# Altium PCB Railgun Control Board PCB Mk2.0.PcbDoc (part 1 of 2)
Units mm, origin at the board's own origin, x right, y up, seen from the top; angles counter-clockwise.
Board outline 60 x 60 mm, 4 copper layers (Top Layer, Layer 1, Layer 2, Bottom Layer), stack 1.312 mm thick; 103 components, 59 nets, 337 pads, 9 vias.
Unrouted connection lines stored in the file: 214.
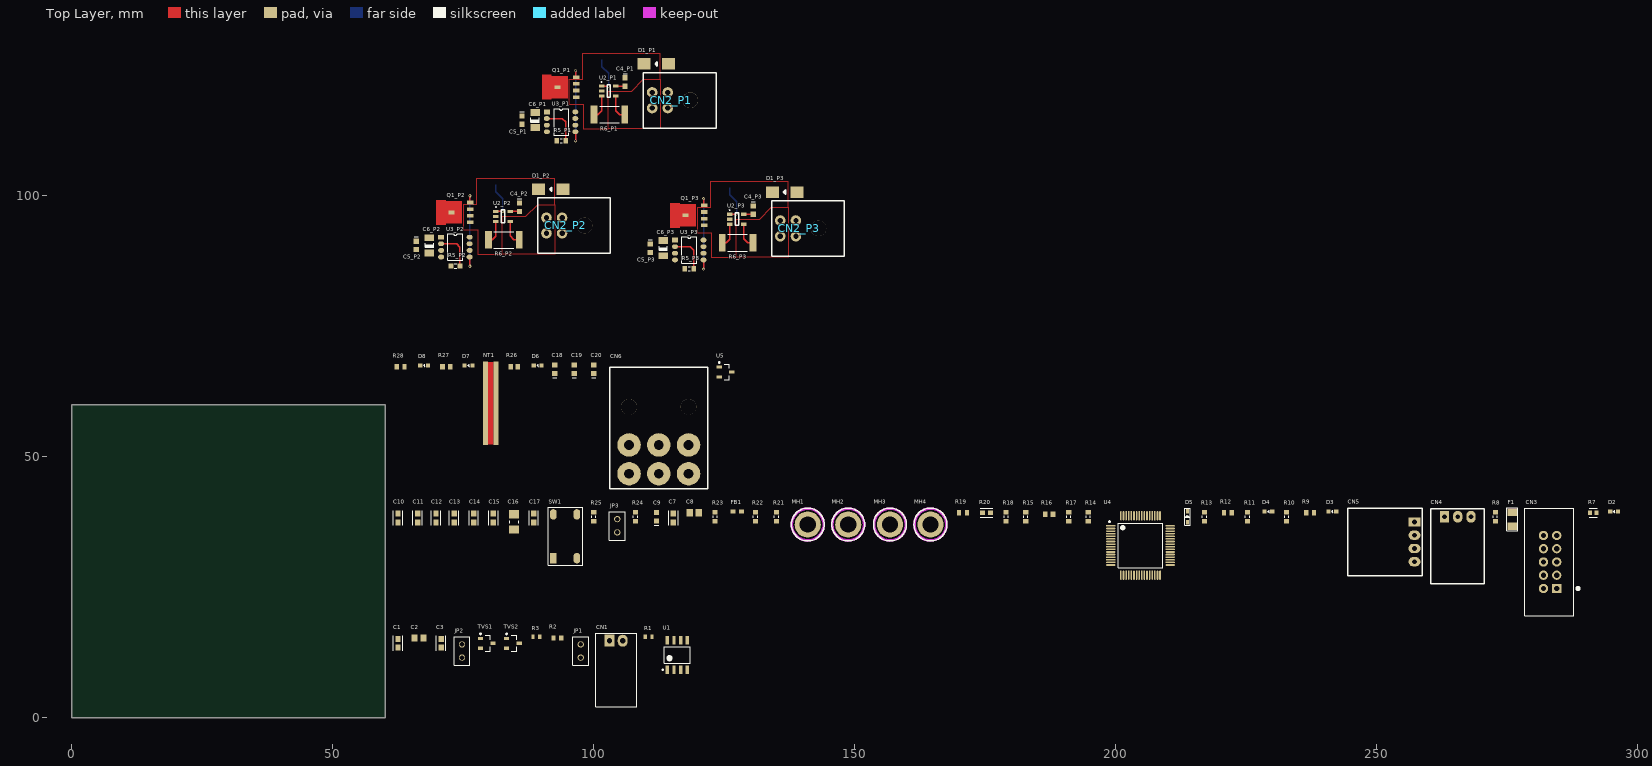
[diagram p0: Top Layer view]
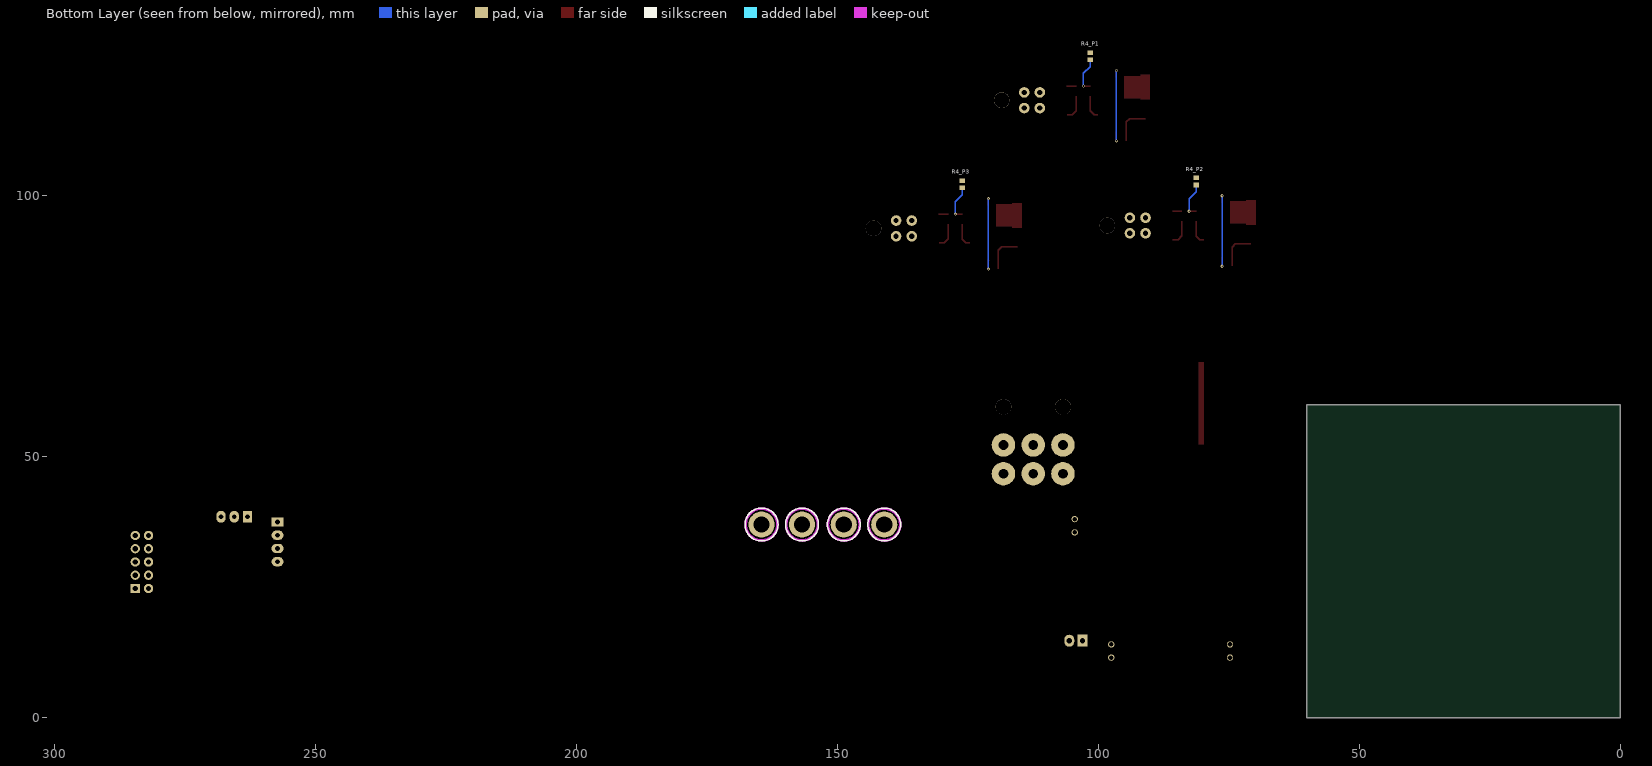
[diagram p1: Bottom Layer view, seen from below]

## Layer stack, top to bottom
Top Solder: solder mask 0.0102, Solder Resist, Dk 3.5
Top Layer: signal copper 0.035
Dielectric 2: prepreg 0.0711, PP-006, Dk 4.6
Layer 1: signal copper 0.0175
Dielectric 1: core 1.065, FR-4, Dk 4.8
Layer 2: signal copper 0.0175
Dielectric 3: prepreg 0.0711, PP-006, Dk 4.6
Bottom Layer: signal copper 0.035
Bottom Solder: solder mask 0.0102, Solder Resist, Dk 3.5

## Board outline
0,0 0,60 60,60 60,0

## Design rules (kind name [scope] priority, off if disabled: settings)
Clearance [All] p1: gap=0.254 ignorepadtopadclearanceinfootprint=TRUE except(0: Arc-Hole Track-Hole Via-Hole Fill-Hole Poly-Hole Region-Hole Text-Hole; 0.09: Arc-Arc Arc-Track Track-Track; 0.127: SMDPad-SMDPad; 0.2: Arc-SMDPad Track-SMDPad; 0.54: SMDPad-Hole THPad-Hole)
DiffPairsRouting [All] p1: maxlimit=0.254 minlimit=0.254 mostfreqgap=0.254 toplayer_minwidth=0.254 toplayer_maxwidth=0.381 toplayer_prefwidth=0.381 midlayer1_minwidth=0.254 midlayer1_maxwidth=0.381 midlayer1_prefwidth=0.381 midlayer2_minwidth=0.254 midlayer2_maxwidth=0.381 midlayer2_prefwidth=0.381 bottomlayer_minwidth=0.254 bottomlayer_maxwidth=0.381 bottomlayer_prefwidth=0.381 maxuncoupledlength=12.7
HoleToHoleClearance [All] p1: gap=0.54 allowstackedmicrovias=TRUE
PolygonConnect [All] p1: connectstyle=Relief reliefconductorwidth=0.254 reliefentries=4 polygonreliefangle="90 Angle" airgapwidth=0.254
RoomDefinition P1 [InComponentClass('P1')] p1: confinementstyle=ConfineIn formatcopy=TRUE lockcomponents=FALSE outline 82.5,107.5 123.75,107.5 123.75,129.5 82.5,129.5
RoomDefinition Power [InComponentClass('Power')] p2: confinementstyle=ConfineIn formatcopy=TRUE lockcomponents=FALSE outline 61,43.5 127.5,43.5 127.5,70.25 61,70.25
RoomDefinition P3 [InComponentClass('P3')] p3: confinementstyle=ConfineIn formatcopy=TRUE lockcomponents=FALSE outline 107.05,82.95 148.3,82.95 148.3,104.95 107.05,104.95
RoomDefinition P2 [InComponentClass('P2')] p4: confinementstyle=ConfineIn formatcopy=TRUE lockcomponents=FALSE outline 62.25,83.5 103.5,83.5 103.5,105.5 62.25,105.5
RoomDefinition Micro [InComponentClass('Micro')] p5: confinementstyle=ConfineIn formatcopy=TRUE lockcomponents=FALSE outline 61.25,19.25 296.999,19.25 296.999,42.25 61.25,42.25
RoomDefinition CAN [InComponentClass('CAN')] p6: confinementstyle=ConfineIn formatcopy=TRUE lockcomponents=FALSE outline 61.25,1.75 119.25,1.75 119.25,18.25 61.25,18.25
RoutingVias [All] p1: holewidth=0.3 width=0.6 viastyle="Through Hole" minholewidth=0.2 minwidth=0.45 maxholewidth=2 maxwidth=2
SolderMaskExpansion [All] p1: expansion=0.1 istentingtop=FALSE
UnRoutedNet [All] p1: checkbadconnections=TRUE
Width [All] p1: maxlimit=0.254 minlimit=0.09 preferedwidth=0.203 toplayer_prefwidth=0.203 midlayer2_prefwidth=0.203 bottomlayer_prefwidth=0.203 minimp=50.000000 maximp=50.000000 favimp=50.000000
27 further rules are at their usual default settings.

## Classes and differential pairs
channel class "Control Gates": P1 P2 P3
net class Phase_Input[1..3]: Phase_Input1 Phase_Input2 Phase_Input3
net class Phase_Current[1..3]: Phase_Current1 Phase_Current2 Phase_Current3
component class Power: C18 C19 C20 CN6 D6 D7 D8 NT1 R26 R27 R28 U5
component class P3: C4_P3 C5_P3 C6_P3 CN2_P3 D1_P3 Q1_P3 R4_P3 R5_P3 R6_P3 U2_P3 U3_P3
component class P2: C4_P2 C5_P2 C6_P2 CN2_P2 D1_P2 Q1_P2 R4_P2 R5_P2 R6_P2 U2_P2 U3_P2
component class P1: C4_P1 C5_P1 C6_P1 CN2_P1 D1_P1 Q1_P1 R4_P1 R5_P1 R6_P1 U2_P1 U3_P1
component class Micro: C7 C8 C9 C10 C11 C12 C13 C14 C15 C16 C17 CN3 CN4 CN5 D2 D3 D4 D5 F1 FB1 JP3 MH1 MH2 MH3 MH4 R7 R8 R9 R10 R11 R12 R13 R14 R15 R16 R17 R18 R19 R20 R21 R22 R23 R24 R25 SW1 U4
component class CAN: C1 C2 C3 CN1 JP1 JP2 R1 R2 R3 TVS1 TVS2 U1
differential pair CAN: +CAN_P -CAN_N

## Components (designator, comment, footprint, x,y, rotation, side; value= is the part's Value field where it differs from the comment)
C1 "CL10B104JB8NNNC" FP-CL10-0_1-IPC_A 62.5,14.25 r90 top
C2 "CL21B105KBFNNNG" "0803 CAP" 66.5,15.25 r0 top
C3 "CL10B104JB8NNNC" FP-CL10-0_1-IPC_A 70.75,14.25 r90 top
C4_P1 "0.1uF, 50V, 10%, X7R, 1608" "CAPC1608N(0603\")" 106,121.8 r270 top (schematic designator C4)
C4_P2 "0.1uF, 50V, 10%, X7R, 1608" "CAPC1608N(0603\")" 85.75,97.8 r270 top (schematic designator C4)
C4_P3 "0.1uF, 50V, 10%, X7R, 1608" "CAPC1608N(0603\")" 130.55,97.25 r270 top (schematic designator C4)
C5_P1 "0.1uF, 50V, 10%, X7R, 1608" "CAPC1608N(0603\")" 86.25,114.5 r270 top (schematic designator C5)
C5_P2 "0.1uF, 50V, 10%, X7R, 1608" "CAPC1608N(0603\")" 66,90.5 r270 top (schematic designator C5)
C5_P3 "0.1uF, 50V, 10%, X7R, 1608" "CAPC1608N(0603\")" 110.8,89.95 r270 top (schematic designator C5)
C6_P1 "10uF 50V 1206 SMD, Ceramic" "CAPC3216N(1206\")" 88.75,114.5 r270 top value=10µF (schematic designator C6)
C6_P2 "10uF 50V 1206 SMD, Ceramic" "CAPC3216N(1206\")" 68.5,90.5 r270 top value=10µF (schematic designator C6)
C6_P3 "10uF 50V 1206 SMD, Ceramic" "CAPC3216N(1206\")" 113.3,89.95 r270 top value=10µF (schematic designator C6)
C7 "CL10B104JB8NNNC" FP-CL10-0_1-IPC_A 115.25,38.25 r90 top
C8 "CL21B105KBFNNNG" "0803 CAP" 119.25,39.25 r0 top
C9 "2.2uF, 50V, 0603 SMD, X5R, Ceramic" "CAPC1608N(0603\")" 112,38.5 r90 top value=2.2µF
C10 "CL10B104JB8NNNC" FP-CL10-0_1-IPC_A 62.5,38.25 r90 top
C11 "CL10B104JB8NNNC" FP-CL10-0_1-IPC_A 66.25,38.25 r90 top
C12 "CL10B104JB8NNNC" FP-CL10-0_1-IPC_A 69.75,38.25 r90 top
C13 "CL10B104JB8NNNC" FP-CL10-0_1-IPC_A 73.25,38.25 r90 top
C14 "CL10B104JB8NNNC" FP-CL10-0_1-IPC_A 77,38.25 r90 top
C15 "CL10B104JB8NNNC" FP-CL10-0_1-IPC_A 80.75,38.25 r90 top
C16 "CL31B106KBHNNNE" CAPC3216X180X50ML20T30 84.75,37.5 r90 top
C17 "CL10B104JB8NNNC" FP-CL10-0_1-IPC_A 88.5,38.25 r90 top
C18 "0.1uF, 50V, 10%, X7R, 1608" "CAPC1608N(0603\")" 92.5,66.75 r90 top
C19 "1uF 50V 0603 SMD, Ceramic" "CAPC1608N(0603\")" 96.25,66.75 r90 top value=1µF
C20 "1uF 50V 0603 SMD, Ceramic" "CAPC1608N(0603\")" 100,66.75 r90 top value=1µF
CN1 "1x2 Shrouded Right Angle" "2X1 Female Header" 103,14.75 r90 top
CN2_P1 "Header, Female, 2x2, RIght Angle, Pitch: 0.118\"  (3.00mm), THT" "2x2 Pitch 118mil connector" 114.18,119.8 r270 top (schematic designator CN2)
CN2_P2 "Header, Female, 2x2, RIght Angle, Pitch: 0.118\"  (3.00mm), THT" "2x2 Pitch 118mil connector" 93.93,95.8 r270 top (schematic designator CN2)
CN2_P3 "Header, Female, 2x2, RIght Angle, Pitch: 0.118\"  (3.00mm), THT" "2x2 Pitch 118mil connector" 138.73,95.25 r270 top (schematic designator CN2)
CN3 "ST Debug Header 10-pin THT" "10-pin shrouded header THT" 284.499,24.75 r90 top
CN4 "Header, Male, 1x3, RA, Pitch (2.54mm) 0.1\"" 5-103635-2-Footprint-1 262.999,38.5 r90 top
CN5 "Header, Male, 1x4, RA, Pitch 0.1\" (2.54mm)" "HEADER, MALE, SHROUDED, 4x1, PITCH 0.1\" (2.54mm), RA" 257.249,37.5 r0 top
CN6 "76825-0006" 76825-0006-Footprint-1 106.75,52.25 r0 top
D1_P1 "TSSA5U50E3GCT-ND" DO-214AC 112,125.25 r180 top (schematic designator D1)
D1_P2 "TSSA5U50E3GCT-ND" DO-214AC 91.75,101.25 r180 top (schematic designator D1)
D1_P3 "TSSA5U50E3GCT-ND" DO-214AC 136.55,100.7 r180 top (schematic designator D1)
D2 "LSQ976-NR-1" FP-LB_Q39E-MFG 295.499,39.5 r0 top
D3 "LBQ39E-N1OO-35-1" FP-LB_Q39E-MFG 241.5,39.5 r0 top
D4 "LT Q39G-Q1OO-25-1" FP-LB_Q39E-MFG 229.25,39.5 r0 top
D5 "CUS08F30,H3F" SC-76 213.75,38.5 r90 top
D6 "LT Q39G-Q1OO-25-1" FP-LB_Q39E-MFG 89.25,67.5 r0 top
D7 "LT Q39G-Q1OO-25-1" FP-LB_Q39E-MFG 76,67.5 r0 top
D8 "LT Q39G-Q1OO-25-1" FP-LB_Q39E-MFG 67.5,67.5 r0 top
F1 "SMD Fuse, 2A, 63V," "1206 SMD" 275.999,38 r90 top
FB1 "BLM18AG601SN1D" MURA-BLM18-F-H1-CHIP-2_V 127.5,39.5 r0 top
JP1 "1x2 Male Header" "2X1 Males Header" 97.5,11.5 r90 top
JP2 "1x2 Male Header" "2X1 Males Header" 74.75,11.5 r90 top
JP3 "1x2 Male Header" "2X1 Males Header" 104.5,35.5 r90 top
MH1 "Mount_Hole_3mm" Mount-Hole_3mm 141,37 r0 top
MH2 "Mount_Hole_3mm" Mount-Hole_3mm 148.75,37 r0 top
MH3 "Mount_Hole_3mm" Mount-Hole_3mm 156.75,37 r0 top
MH4 "Mount_Hole_3mm" Mount-Hole_3mm 164.5,37 r0 top
NT1 "Net Tie, 16x3mm" NETTIE_16x3mm 80.25,60.25 r0 top net-tie
Q1_P1 "MOSFET N-Channel, 40V, 100A, 272W" LFPAK-PowerSO8 96.6,118.895 r90 top (schematic designator Q1)
Q1_P2 "MOSFET N-Channel, 40V, 100A, 272W" LFPAK-PowerSO8 76.35,94.895 r90 top (schematic designator Q1)
Q1_P3 "MOSFET N-Channel, 40V, 100A, 272W" LFPAK-PowerSO8 121.15,94.345 r90 top (schematic designator Q1)
R1 "RC0603FR-0733RL" RESC1608X55X25LL10T15 110.5,15.5 r0 top
R2 "RC0603FR-07120RL" RESC1608X55X25ML10T15 93,15.25 r0 top
R3 "RC0603FR-0733RL" RESC1608X55X25LL10T15 89,15.5 r0 top
R4_P1 "32.4kR, 1%, 0603, 1/10W" RESC1609X50X30ML10T20 101.5,126.75 r270 bottom (schematic designator R4)
R4_P2 "32.4kR, 1%, 0603, 1/10W" RESC1609X50X30ML10T20 81.25,102.75 r270 bottom (schematic designator R4)
R4_P3 "32.4kR, 1%, 0603, 1/10W" RESC1609X50X30ML10T20 126.05,102.2 r270 bottom (schematic designator R4)
R5_P1 "10kR, 1%, 1/10W, 0603 SMD" "RESC1608N(0603\")" 93.75,110.55 r180 top value=10k (schematic designator R5)
R5_P2 "10kR, 1%, 1/10W, 0603 SMD" "RESC1608N(0603\")" 73.5,86.55 r180 top value=10k (schematic designator R5)
R5_P3 "10kR, 1%, 1/10W, 0603 SMD" "RESC1608N(0603\")" 118.3,86 r180 top value=10k (schematic designator R5)
R6_P1 "0R02, 1%, 2W, 2512 SMD" "RESC6332N(2512\")" 103,115.55 r180 top value=0.02 (schematic designator R6)
R6_P2 "0R02, 1%, 2W, 2512 SMD" "RESC6332N(2512\")" 82.75,91.55 r180 top value=0.02 (schematic designator R6)
R6_P3 "0R02, 1%, 2W, 2512 SMD" "RESC6332N(2512\")" 127.55,91 r180 top value=0.02 (schematic designator R6)
R7 "CRCW0603330RFKEA" FP-CRCW0603-e3-IPC_C 291.499,39.25 r0 top
R8 "1kR, 1%, 1/10W , 0603, SMD" "RESC1608N(0603\")" 272.749,38.5 r90 top value=1k
R9 "RC0603FR-07110RL" RESC1608X55X25ML10T15 237.25,39.25 r0 top
R10 "10kR, 1%, 1/10W, 0603 SMD" "RESC1608N(0603\")" 232.75,38.5 r90 top value=10k
R11 "10kR, 1%, 1/10W, 0603 SMD" "RESC1608N(0603\")" 225.25,38.5 r90 top value=10k
R12 "RC0603FR-07110RL" RESC1608X55X25ML10T15 221.5,39.25 r0 top
R13 "10kR, 1%, 1/10W, 0603 SMD" "RESC1608N(0603\")" 217,38.5 r90 top value=10k
R14 "10kR, 1%, 1/10W, 0603 SMD" "RESC1608N(0603\")" 194.75,38.5 r90 top value=10k
R15 "10kR, 1%, 1/10W, 0603 SMD" "RESC1608N(0603\")" 182.75,38.5 r90 top value=10k
R16 "ERJ-3EKF8252V" RESC1608X55X30ML15T15 187.25,39 r0 top
R17 "16kR, 1%, 1/10W, 0603 SMD" "RESC1608N(0603\")" 191,38.5 r90 top value=16k
R18 "10kR, 1%, 1/10W, 0603 SMD" "RESC1608N(0603\")" 179,38.5 r90 top value=10k
R19 "RC0603FR-0710KL" RESC1608X55X25ML10T15 170.75,39.25 r0 top
R20 "27kR, 1%, 1/10W, 0603" FP-CRGCQ0603-IPC_B 175.25,39.25 r0 top
R21 "1kR, 1%, 1/10W , 0603, SMD" "RESC1608N(0603\")" 135,38.5 r90 top value=1k
R22 "1kR, 1%, 1/10W , 0603, SMD" "RESC1608N(0603\")" 131,38.5 r90 top value=1k
R23 "1kR, 1%, 1/10W , 0603, SMD" "RESC1608N(0603\")" 123.25,38.5 r90 top value=1k
R24 "10kR, 1%, 1/10W, 0603 SMD" "RESC1608N(0603\")" 108,38.5 r90 top value=10k
R25 "10kR, 1%, 1/10W, 0603 SMD" "RESC1608N(0603\")" 100,38.5 r90 top value=10k
R26 "CRCW06036K34FKEA" RESC1609X50X30ML10T20 84.75,67.25 r0 top
R27 "ERJ-3EKF5360V" RESC1608X55X30ML15T15 71.75,67.25 r0 top
R28 "RC0603FR-07110RL" RESC1608X55X25ML10T15 63,67.25 r0 top
SW1 "PTS645SL43SMTR92LFS" 4-SPST-NO 92.25,30.75 r90 top
TVS1 "PESD36VS2UT,215" SOT95P245X110-3N 79.5,14.25 r0 top
TVS2 "PESD36VS2UT,215" SOT95P245X110-3N 84.5,14.25 r0 top
U1 "CAN Transceiver" 8-SOIC 116,12 r90 top
U2_P1 "INA168, Current Sensor, High-Side, Analog" SOT23-5 102.85,120.05 r270 top (schematic designator U2)
U2_P2 "INA168, Current Sensor, High-Side, Analog" SOT23-5 82.6,96.05 r270 top (schematic designator U2)
U2_P3 "INA168, Current Sensor, High-Side, Analog" SOT23-5 127.4,95.5 r270 top (schematic designator U2)
U3_P1 "MIC5014YM-TR" "SOC 8" 91,116.07 r0 top (schematic designator U3)
U3_P2 "MIC5014YM-TR" "SOC 8" 70.75,92.07 r0 top (schematic designator U3)
U3_P3 "MIC5014YM-TR" "SOC 8" 115.55,91.52 r0 top (schematic designator U3)
U4 "STM32F413RGT6" FP-LQFP64-5W-IPC_A 204.75,33 r0 top
U5 "3.3V 250mA Linear Reg LDO" SOT95P245X110-3N 125.25,66.25 r0 top

## Footprints (in the part's own frame and the unit in brackets; to place one, negate y for a bottom-side part, rotate by r counter-clockwise, add the part's x,y. Pads: shape width x height; smd on the part's side, far side on the other; paste and mask are expansions set on the pad)
"2X1 Female Header" [mil]
  rect 90x75 hole 40: 1(0,0)
  oval 90x75 hole 40: 2(0,-100)
  silkscreen extent -500,-205 55,105, body extent -495,-200 40,100, height 273
"2X1 Males Header" [mm]
  round 1.2 hole 0.9: 1(0,0) 2(2.54,0)
  silkscreen extent -1.5,-1.5 4,1.5, body extent -1.27,-1.24 3.81,1.25, height 8.54
"2x2 Pitch 118mil connector" [mil]
  round 80 hole 40: 1(0,0) 2(117.99,0) 3(0,-118) 4(118,-118)
  round 118.11 hole 118.11: None(59.06,170.08)
  silkscreen extent -150,-184 270,365, body extent -141,-129 259,353, height 348
4-SPST-NO [mm]
  rect 2x1.3 smd: 1(-0.2,0)
  oval 2x1.3 smd: 2(8.2,0) 3(-0.2,-4.5) 4(8.2,-4.5)
  silkscreen extent -1.52,-5.59 9.53,1.02, body extent -0.56,-5.29 8.44,0.71, height 5
5-103635-2-Footprint-1 [mil]
  rect 90x70 hole 35: 1(0,0)
  oval 90x70 hole 35: 2(0,-100) 3(0,-200)
  silkscreen extent -505,-300 60,105, body extent -495,-295 40,100, height 280
8-SOIC [mm] "SOIC, 8-Leads, Body 5x4mm, Pitch 1.27mm, IPC Low Density"
  rrect15% 1.65x0.65 smd: 1(-2.825,1.905) 2(-2.825,0.635) 3(-2.825,-0.635) 4(-2.825,-1.905) 5(2.825,-1.905) 6(2.825,-0.635) 7(2.825,0.635) 8(2.825,1.905)
  silkscreen extent -2.95,-2.5 1.6,2.9, body extent -3,-2.45 3,2.45, height 1.63
"10-pin shrouded header THT" [mil]
  rect 70x70 hole 40: 1(0,0)
  round 70 hole 40: 2(100,0) 3(200,0) 4(300,0) 5(400,0) 6(0,100) 7(100,100) 8(200,100) 9(300,100) 10(400,100)
  silkscreen extent -205,-170 605,240, body extent -198,-124 598,234, height 358
"0803 CAP" [mm] "Chip Capacitor, 2-Leads, Body 2.00x1.25mm, IPC Medium Density"
  rect 1.2x1.4 smd: 1(-0.85,0) 2(0.85,0)
  body extent -1.05,-0.67 1.05,0.67, height 1.25
"1206 SMD" [mm]
  rect 1.42x1.78 smd: 1(-1.33,0) 2(1.33,0)
  silkscreen extent -2.22,-1.07 2.21,1.07, body extent -1.6,-0.8 1.6,0.8, height 0.6
76825-0006-Footprint-1 [mm]
  round 4.5 hole 1.85: 1(0,0) 2(5.7,0) 3(11.4,0) 4(0,-5.5) 5(5.7,-5.5) 6(11.4,-5.5)
  round 3.05 hole 3.05: None1(0,7.3) None2(11.4,7.3)
  silkscreen extent -3.68,-8.38 15.11,14.86, body extent -3.16,-6.03 14.6,15.93, height 14.54
"CAPC1608N(0603\")" [mm] "Chip Capacitor, Body 1.6x0.8mm (0603\"), IPC Medium Density"
  rect 1x1 smd: 1(-0.8,0) 2(0.8,0)
  silkscreen extent -1.6,-0.4 -1.6,0.4, body extent -0.8,-0.4 0.8,0.4, height 0.9
"CAPC3216N(1206\")" [mm] "Chip Capacitor, Body 3.2x1.6mm (1206\"), IPC Medium Density"
  rect 1.3x1.8 smd: 1(-1.45,0) 2(1.45,0)
  silkscreen extent -0.4,-0.8 0.4,0.8, body extent -1.6,-0.8 1.6,0.8, height 1
CAPC3216X180X50ML20T30 [mm] "Chip Capacitor, 2-Leads, Body 3.4x1.8mm, IPC Low Density"
  rect 1.6x1.9 smd: 1(-1.45,0) 2(1.45,0)
  silkscreen extent -0.25,-0.85 0.25,0.85, body extent -1.7,-0.9 1.7,0.9, height 1.8
DO-214AC [mm]
  rect 2.5x2.2 smd: 1(-2.35,0) 2(2.35,0)
  silkscreen extent -0.2,-0.43 0.23,0.43, body extent -2.74,-1.4 2.74,1.4, height 2.26
FP-CL10-0_1-IPC_A [mm]
  rect 1.158x1.012 smd paste+0 mask+0: 1(-0.827,0) 2(0.827,0)
  silkscreen extent -1.41,-0.91 1.41,0.91, body extent -1.91,-1.01 1.91,1.01, height 0.25
FP-CRCW0603-e3-IPC_C [mm]
  rect 0.735x0.862 smd paste+0 mask+0: 1(-0.615,0) 2(0.615,0)
  silkscreen extent -0.75,-0.85 0.75,0.85, body extent -1.08,-0.58 1.08,0.58, height 0.25
FP-CRGCQ0603-IPC_B [mm]
  rect 0.958x0.912 smd paste+0 mask+0: 1(-0.727,0) 2(0.727,0)
  silkscreen extent -1.21,-0.86 1.21,0.86, body extent -1.46,-0.71 1.46,0.71, height 0.25
FP-LB_Q39E-MFG [mm]
  rect 0.8x0.8 smd paste+0 mask+0: 1(-0.75,0) 2(0.75,0)
  silkscreen extent -0.13,-0.25 0.13,0.25, body extent -1.25,-0.55 1.25,0.55, height 0.25
FP-LQFP64-5W-IPC_A [mm]
  rect 1.788x0.312 smd paste+0 mask+0: 1(-5.691,3.75)
  rrect100% 1.788x0.312 smd paste+0 mask+0: 2(-5.691,3.25) 3(-5.691,2.75) 4(-5.691,2.25) 5(-5.691,1.75) 6(-5.691,1.25) 7(-5.691,0.75) 8(-5.691,0.25) 9(-5.691,-0.25) 10(-5.691,-0.75) 11(-5.691,-1.25) 12(-5.691,-1.75) 13(-5.691,-2.25) 14(-5.691,-2.75) 15(-5.691,-3.25) 16(-5.691,-3.75) 33(5.691,-3.75) 34(5.691,-3.25) 35(5.691,-2.75) 36(5.691,-2.25) 37(5.691,-1.75) 38(5.691,-1.25) 39(5.691,-0.75) 40(5.691,-0.25) 41(5.691,0.25) 42(5.691,0.75) 43(5.691,1.25) 44(5.691,1.75) 45(5.691,2.25) 46(5.691,2.75) 47(5.691,3.25) 48(5.691,3.75)
  rrect100% 0.312x1.788 smd paste+0 mask+0: 17(-3.75,-5.691) 18(-3.25,-5.691) 19(-2.75,-5.691) 20(-2.25,-5.691) 21(-1.75,-5.691) 22(-1.25,-5.691) 23(-0.75,-5.691) 24(-0.25,-5.691) 25(0.25,-5.691) 26(0.75,-5.691) 27(1.25,-5.691) 28(1.75,-5.691) 29(2.25,-5.691) 30(2.75,-5.691) 31(3.25,-5.691) 32(3.75,-5.691) 49(3.75,5.691) 50(3.25,5.691) 51(2.75,5.691) 52(2.25,5.691) 53(1.75,5.691) 54(1.25,5.691) 55(0.75,5.691) 56(0.25,5.691) 57(-0.25,5.691) 58(-0.75,5.691) 59(-1.25,5.691) 60(-1.75,5.691) 61(-2.25,5.691) 62(-2.75,5.691) 63(-3.25,5.691) 64(-3.75,5.691)
  silkscreen extent -6.07,-4.25 4.25,4.68, body extent -7.09,-7.09 7.09,7.09, height 0.25
"HEADER, MALE, SHROUDED, 4x1, PITCH 0.1\" (2.54mm), RA" [mil]
  rect 90x70 hole 35: 1(0,0)
  oval 90x70 hole 35: 2(0,-100) 3(0,-200) 4(0,-300)
  silkscreen extent -505,-405 60,105, body extent -495,-397 40,97, height 270
LFPAK-PowerSO8 [mm] "LFPAK-PowerSO8"
  rect 0.7x1.25 smd: 1(0,0) 2(1.27,0) 3(2.54,0) 4(3.81,0)
  rect 0.7x1.15 smd: 5(1.905,3.6)
  Top Layer region: -0.195,1.625 4.005,1.625 4.005,4.725 4.255,4.725 4.255,6.5 3.74,6.5 3.1,6.5 1.9,6.5 -0.445,6.5 -0.445,4.725 -0.195,4.725
  body extent -0.59,-0.4 4.41,6.2, height 1.09
Mount-Hole_3mm [mm]
  round 5 hole 3.1: 1(0,0)
  Keep-Out Layer circle w0.508: c0,0 r3.048
  silkscreen extent -3.15,-3.15 3.15,3.15, body extent -2.25,-2.6 2.25,2.6, height 4.19
MURA-BLM18-F-H1-CHIP-2_V [mm] "Chip Ferrite Bead, 2-Leads, Body 1.6x0.8mm, Height 0.95mm, Flow"
  rect 0.95x0.7 smd: 1(-0.825,0) 2(0.825,0)
  body extent -0.8,-0.4 0.8,0.4, height 0.95
NETTIE_16x3mm [mm]
  rect 1x16 smd: 1(-1,0) 2(1,0)
  Top Layer region: -0.5,-7.9 0.5,-7.9 0.5,7.9 -0.5,7.9
"RESC1608N(0603\")" [mm] "Chip Resistor, Body 1.6x0.8mm (0603\"), IPC Medium Density"
  rect 0.9x1 smd: 1(-0.85,0) 2(0.85,0)
  silkscreen extent -0.2,-0.4 0.2,0.4, body extent -0.77,-0.42 0.78,0.43, height 0.44
RESC1608X55X25LL10T15 [mm] "Chip Resistor, 2-Leads, Body 1.60x0.80mm, IPC High Density"
  rect 0.6x0.8 smd: 1(-0.65,0) 2(0.65,0)
  body extent -0.85,-0.45 0.85,0.45, height 0.55
RESC1608X55X25ML10T15 [mm] "Chip Resistor, 2-Leads, Body 1.70x0.90mm, IPC Low Density"
  rect 0.8x1 smd: 1(-0.75,0) 2(0.75,0)
  body extent -0.85,-0.45 0.85,0.45, height 0.55
RESC1608X55X30ML15T15 [mm] "Chip Resistor, 2-Leads, Body 1.60x0.80mm, IPC Low Density"
  rect 0.9x1.05 smd: 1(-0.725,0) 2(0.725,0)
  body extent -0.87,-0.48 0.87,0.48, height 0.55
RESC1609X50X30ML10T20 [mm] "Chip Resistor, 2-Leads, Body 1.55x0.85mm, IPC Low Density"
  rect 0.9x1.05 smd: 1(-0.675,0) 2(0.675,0)
  body extent -0.82,-0.48 0.82,0.48, height 0.5
"RESC6332N(2512\")" [mm] "Chip Resistor, Body 6.3x3.2mm (2512\"), IPC Medium Density"
  rect 1.3x3.4 smd: 1(-2.95,0) 2(2.95,0)
  silkscreen extent -1.9,-1.6 1.9,1.6, body extent -3.2,-1.6 3.2,1.6, height 0.6
SC-76 [mm]
  rect 0.8x0.6 smd: A(-1.05,0) K(1.05,0)
  silkscreen extent -1.65,-0.5 1.65,0.5, body extent -1.25,-0.65 1.25,0.6, height 0.9
"SOC 8" [mm]
  rect 1.14x0.91 smd: 1(0,0)
  oval 1.14x0.91 smd: 2(0,-1.27) 3(0,-2.54) 4(0,-3.81) 5(5.46,-3.81) 6(5.46,-2.54) 7(5.46,-1.27) 8(5.46,0)
  silkscreen extent 1.3,-4.44 4.16,0.64, body extent -0.33,-4.32 5.67,0.58, height 1.75
SOT23-5 [mm] "SOT23-5 SMT"
  rect 0.6x1.05 smd: 1(-0.95,-1.35) 2(0,-1.35) 3(0.95,-1.35) 4(0.95,1.35) 5(-0.95,1.35)
  silkscreen extent -1.8,-1.4 1.2,0.35, body extent -1.5,-1.25 1.5,1.25, height 1.1
SOT95P245X110-3N [mm] "SOT23, 3-Leads, Body 2.90x2.45mm, Pitch 0.95mm, IPC Medium Density"
  rect 1x0.6 smd: 1(-1.2,0.95) 2(-1.2,-0.95) 3(1.2,0)
  silkscreen extent -1.32,-1.5 0.7,1.92, body extent -1.3,-1.5 1.3,1.5, height 1.1

## Part data
C1 C3 C7 C10 C11 C12 C13 C14 C15 C17: library part CMP-00000-4, "CAP CER 0.1UF 50V X7R 0603", Capacitance=0.1uF, Case Code (Imperial)=0603, Case Code (Metric)=1608, Dielectric=X7R, Max Operating Temperature=125°C, Min Operating Temperature=-55°C, Package Quantity=1, Tolerance=5%, Voltage=50V, Case/Package=0603, Contact Plating=Tin, Depth=0.8mm, Height=0.8mm, Length=1.6mm, Material=Ceramic, Mount="Surface Mount", Packaging="Tape and Reel", Radiation Hardening=No, Thickness=0.035inch, Voltage Rating=50V, Width=0.031inch
C2 C8: library part CMP-00005-3, "SAMSUNG ELECTRO-MECHANICS - CL21B105KBFNNNG - MLCC CAPACITORS", Capacitance=1uF, Case Code (Imperial)=0805, Case Code (Metric)=2012, Dielectric=X7R, Max Operating Temperature=125°C, Min Operating Temperature=-55°C, Package Quantity=3000, Tolerance=10%, Voltage=50V, Case/Package=0805, Contact Plating=Tin, Depth=1.25mm, Length=2mm, Material=Ceramic, Mount="Surface Mount", Packaging="Tape and Reel", Termination=Wraparound, Thickness=0.053inch, Voltage Rating=50V, Width=0.049inch
C4_P1 C4_P2 C4_P3 C5_P1 C5_P2 C5_P3 C18: library part CMP-006-0008-1, "CAP CER 0.1UF 50V 10% X7R 1608 (0603)", Capacitance=0.1µF, Manufacturer="Samsung Electro-Mechanics America, Inc", Manufacturer Part Number=CL10B104KB8SFNC, Operating Temperature="-55°C ~ 125°C", Package / Case="0603 (1608 Metric)", Ratings=-, Temperature Coefficient=X7R, Tolerance=±10%, Voltage - Rated=50V, Applications="Boardflex Sensitive", Category=Capacitors, Component Type=Standard, ComponentLink1Description=http://www.samsungsem.com/servlet/FileDownload?type=spec&file=CL10B104KB8SFNC.pdf, ComponentLink1URL=http://www.samsungsem.com/servlet/FileDownload?type=spec&file=CL10B104KB8SFNC.pdf, Design Item ID="0.1uF, 50V, 10%, X7R, 1608", Features="Soft Termination", Height - Seated (Max)=-, Lead Spacing=-, Lead Style=-, Mounting Type="Surface Mount, MLCC", Packaging="Cut Tape (CT)", Pin Count=2, Pricing 1="1=0.12, 10=0.033, 25=0.0232, 100=0.0152, 500=0.01064, 1000=0.00829 (CAD)", RoHS="RoHS Compliant", Size / Dimension="0.063\" L x 0.031\" W (1.60mm x 0.80mm)", Source=AUVic_Schematic_Library_Capacitors.SchLib, Stock 1=743572, Thickness (Max)="0.035\" (0.90mm)"
C6_P1 C6_P2 C6_P3: library part CMP-006-0018-1, "Capacitor, Ceramic, 50V, +/- 10%, 1206 SMD, X5R", Component Type=Standard, Design Item ID="10uF 50V 1206 SMD, Ceramic", PackageDescription="Chip Capacitor", Pin Count=2, Published=14-06-01, Publisher=AUVic, Source=AUVic_Schematic_Library_Capacitors.SchLib
C9: library part CMP-006-0030-1, "Capacitor, Ceramic, 50V, 10%, 0603 SMD, X5R", Component Type=Standard, Design Item ID="2.2uF, 50V, 0603 SMD, X5R, Ceramic", PackageDescription="Chip Capacitor", Pin Count=2, Publisher=AUVic, Source=AUVic_Schematic_Library_Capacitors.SchLib
C16: library part CMP-00004-1, "Cap Ceramic 10uF 50V X7R 10% Pad SMD 1206 125°C T/R", Capacitance=10uF, Case Code (Imperial)=1206, Case Code (Metric)=3216, Dielectric=X7R, Max Operating Temperature=125°C, Min Operating Temperature=-55°C, Tolerance=10%, Voltage Rating=50V, Case/Package=1206, Lead Free="Lead Free", Length=0.126inch, Mount="Surface Mount", Packaging="Tape and Reel", Thickness=0.071inch, Voltage Rating (DC)=50V, Width=0.063inch
C19 C20: library part CMP-006-0028-1, "Capacitor, Ceramic, 50V, +/- 10%, 0603 SMD, X5R", Component Type=Standard, Created By="Lyden Smith", Date Created=2017-10-26, Design Item ID="1uF 50V 0603 SMD, Ceramic", PackageDescription="Chip Capacitor", Pin Count=2, Source=AUVic_Schematic_Library_Capacitors.SchLib
CN1: library part CMP-00010-3, "02 MTE HDR SRRA LATCH", Color=Black, Contact Current Rating=3A, Contact Resistance=15mR, Flammability Rating="UL94 V-0", Insulation Resistance=5GR, Max Operating Temperature=105°C, Min Operating Temperature=-65°C, Package Quantity=68, Approvals=CSA, Backwall/Post Interruptions="No (Without)", Connector Type=Plug,Header,Pin, Contact Gender=Male, Contact Material=Brass, Contact Mating Length=0.23inch, Contact Plating=Gold,Tin,Matte, Contact Retention="Yes (With)", Contact Shape=Square, Current Rating=3A, Depth=13.59mm, ELV=Compliant, Gender=Male, Height=13.59mm, Housing Color=Black, Housing Material=Thermoplastic, Lead Free="Lead Free", Length=7.62mm, Mating Alignment="Yes (With)", Mating Retention="Yes (With)", Mount="Through Hole", Number of Contacts=2, Number of Positions=2, Number of Rows=1, Orientation="Right Angle", Packaging=Rail/Tube, PCB Mount Alignment="No (Without)", PCB Mount Retention=Without, PCB Mounting Orientation="Right Angle", PCB Thickness=0.062inch, Pitch=2.54mm, REACH SVHC=Unknown, Row Spacing=0.1inch, Strain Relief="No (Without)", Tail Length=3.3mm, Termination=Crimp
CN2_P1 CN2_P2 CN2_P3: library part CMP-005-0021-4, "Connector Header Through Hole, Right Angle 4 position 0.118\" (3.00mm)", Component Type=Standard, Created By="Poorna Chander Kalidas", Date Published=2020-05-16, Design Item ID="Header, Female, 2x2, RIght Angle, Pitch: 0.118\"  (3.00mm), THT", Pin Count=4, Publisher=AUVic, Source=AUVic_Schematic_Library_Connectors.SchLib
CN3: library part CMP-00011-6, "CONN HEADER VERT 10POS 2.54MM", Color=Black, Package Quantity=1, Connector Type="Male Pin", Contact Plating=Gold, Lead Free="Lead Free", Mount="Through Hole", Number of Positions=10, Number of Rows=2, Packaging=Tray, Pitch=0.1inch, Row Spacing=0.1inch, Termination=Solder
CN4: library part CMP-00099-4, "CONN HEADER RT/A .100 3POS 15AU", Color=Black, Contact Current Rating=3A, Contact Resistance=15mR, Flammability Rating="UL94 V-0", Insulation Resistance=5GR, Max Operating Temperature=105°C, Min Operating Temperature=-65°C, Package Quantity=52, Approvals=CSA, Backwall/Post Interruptions="No (Without)", Connector Type=Plug,Header,Pin, Contact Gender=Male, Contact Material=Brass, Contact Mating Length=0.23inch, Contact Plating=Gold,Tin,Matte, Contact Retention="Yes (With)", Contact Shape=Square, Current Rating=3A, Depth=13.59mm, Height=13.59mm, Housing Color=Black, Housing Material=Thermoplastic, Lead Pitch=2.54mm, Length=0.4inch, Mating Alignment="Yes (With)", Mating Retention="Yes (With)", Mount="Through Hole", Number of Contacts=3, Number of Positions=3, Number of Rows=1, Orientation="Right Angle", Packaging=Rail/Tube, PCB Mount Alignment="No (Without)", PCB Mount Retention=Without, PCB Mounting Orientation="Right Angle", Pitch=2.54mm, Plating Thickness=2.54um, REACH SVHC="No SVHC", Row Spacing=0.1inch, Strain Relief="No (Without)", Tail Length=3.3mm, Termination=Crimp, Width=0.4inch
CN5: library part CMP-005-0029-3, "Connector Header Through Hole, Right Angle 4 position 0.100\" (2.54mm)", Component Type=Standard, Created By="Miguel Manguerra", Created On=2020-05-20, Design Item ID="Header, Male, 1x4, RA, Pitch 0.1\" (2.54mm)", Pin Count=4, Source=AUVic_Schematic_Library_Connectors.SchLib
CN6: library part CMP-00049-2, "CONNECTOR, HEADER, 6POS, 2ROW, 5.7MM; Product Range:Mega-Fit 76825 Series; Contact Termination Type:Through Hole; Gender:Header; No. of Contacts:6; Pitch Spacing:5.7mm; Contact Plating:Tin Plated Contacts; Contact Material:Copper", Color=Black, Contact Material=Copper, Contact Plating=Tin, Gender=Male, Mount="Through Hole", Number of Circuits=6, Number of Contacts=6, Number of Pins=6, Number of Rows=2, Orientation="Right Angle", Pitch=5.7mm, REACH SVHC=Unknown, Termination="Through Hole"
D1_P1 D1_P2 D1_P3: library part CMP-057-0021-1, "Diode Schottky 50V 5A Surface Mount DO-214AC (SMA)", Component Type=Standard, Created By="Poorna Chander Kalidas", Date Created=2018-06-01, Design Item ID=TSSA5U50E3GCT-ND, Pin Count=2, Source=AUVic_Schematic_Library_Diodes.SchLib
D2: library part CMP-00066-2, "LED Red 645nm 2-Pin Chip 0603(1608Metric) T/R", Case Code (Imperial)=0603, Case Code (Metric)=1608, Color=Red, Forward Current=25mA, Forward Voltage=2.5V, Lens Color=White, Max Operating Temperature=85°C, Min Operating Temperature=-30°C, Package Quantity=1, Power Dissipation=65mW, Reverse Voltage=12V, Test Current=20mA, Case/Package=0603, Depth=0.9mm, Dominant Wavelength=633nm, Height=0.8mm, Illumination Color=Red, Length=1.7mm, Lens Size=0.8mm, Lens Style=Diffused,Flat,Colorless,Rectangular, Lens Transparency=Diffused, Luminous Flux=0.33lm, Luminous Intensity=180mcd, Mount="Surface Mount", Number of Elements=1, Number of LEDs=1, Number of Pins=2, Packaging="Tape and Reel", Radiation Hardening=No, Viewing Angle=160°, Width=0.8mm
D3: library part CMP-00063-3, "LED BLUE DIFFUSED 0603 SMD", Case Code (Imperial)=0603, Case Code (Metric)=1608, Color=Blue, Forward Voltage=2.85V, Lens Color=White, Test Current=5mA, Case/Package=0603, Dominant Wavelength=470nm, Height=0.4mm, Length=1.6mm, Lens Size=0.8mm, Lens Style=Flat,Diffused,Colorless,Rectangular, Lens Transparency=Diffused, Luminous Flux=0.13lm, Luminous Intensity=42mcd, Mount="Surface Mount", Number of LEDs=1, Number of Pins=2, Packaging="Tape and Reel", Radiation Hardening=No, Viewing Angle=130°, Width=0.8mm
D4 D6 D7 D8: library part CMP-00064-3, "LED GREEN DIFFUSED 0603 SMD", Case/Package=SMD/SMT, Color=Green, Forward Current=15mA, Forward Voltage=2.85V, Max Operating Temperature=85°C, Min Operating Temperature=-40°C, Reverse Voltage=5V, Test Current=5mA, Depth=0.9mm, Dominant Wavelength=530nm, Length=1.7mm, Lens Style=Diffused,Colorless,Rectangular, Luminous Flux=0.55lm, Luminous Intensity=280mcd, Mount="Surface Mount", Number of Elements=1, Number of LEDs=1, Number of Pins=2, Packaging="Tape and Reel", Radiation Hardening=No
D5: library part CMP-057-0000-2, "Diode Schottky 30V 800mA Surface Mount USC", Average Rectified Current=800mA, Case/Package=SOD, Max Operating Temperature=125°C, Max Repetitive Reverse Voltage (Vrrm)=30V, Min Operating Temperature=-55°C, Peak Non-Repetitive Surge Current=5A, Peak Reverse Current=50uA, Contact Plating=Tin,Silver, Element Configuration=Single, Max Reverse Voltage (DC)=30V, Mount="Surface Mount", Number of Pins=2, Packaging="Tape and Reel"
F1: library part CMP-027-0004-1, Current=2A, Component Type=Standard, ComponentLink1Description=Digi-Key, ComponentLink1URL=https://www.digikey.ca/product-detail/en/bel-fuse-inc/C1F-2/507-1881-1-ND/4968159, Created By="Poorna Chander Kalidas", Date Created=2018-06-07, Design Item ID="SMD Fuse, 2A, 63V,", Pin Count=2, Source=AUVic_Integrated_Library_Fuses.SchLib, Type=SMD
FB1: library part CMP-00016-1, "MURATA - BLM18AG601SN1D - Feritový Korálek, 0603 / 1608, 600 ohm, 500 mA, Série BLM18A, 0.38 ohm, ± 25%", Case Code (Imperial)=0603, Case Code (Metric)=1608, Current Rating=500mA, DC Resistance (DCR)=380mR, Frequency=100MHz, Max Operating Temperature=125°C, Min Operating Temperature=-55°C, Package Quantity=1, Tolerance=25%, Case/Package=0603, Core Material=Ferrite, DC Current=500mA, Depth=0.8mm, Height=0.8mm, Impedance=600R, Lead Free="Lead Free", Length=1.6mm, Material=Steel,Ferrite, Max Current Rating=500mA, Max DC Current=500mA, Military Standard=Not, Number of Circuits=1, Number of Lines=1, Number of Pins=2, Packaging="Tape and Reel", Radiation Hardening=No, REACH SVHC="No SVHC", Shielding=Unshielded, Termination=SMD/SMT, Test Frequency=100MHz, Weight=7.1E-05oz, Width=0.8mm
JP1 JP2 JP3: library part CMP-004-0001-1, Component Type=Standard, Design Item ID="1x2 Male Header", Made By="Andy Bates", Pin Count=2, Source=AUVic_Schematic_Library_Connectors.SchLib
MH1 MH2 MH3 MH4: library part CMP-004-0010-4, "Mounting hold for M3 hex standoff", Component Type=Standard, Design Item ID=Mount_Hole_3mm, Pin Count=1, Source=AUVic_Schematic_Library_Connectors.SchLib
NT1: library part CMP-053-0004-1, Component Type="Net Tie", Created By="Ashwin Sira", Date Created=2016-06-17, Design Item ID="Net Tie, 16x3mm", Pin Count=2, Publisher=AUVic, Size=16mmx3mm, Source=AUVic_Integrated_Library_Virtual_Components.SchLib
Q1_P1 Q1_P2 Q1_P3: library part CMP-052-0019-1, "MOSFET N-Channel, 40V, 100A, 272W, Enh-Mode", Component Type=Standard, Created By="Ashwin Sira", Design Item ID="MOSFET N-Channel, 40V, 100A, 272W", Latest_Revision_By="Ashwin Sira", Latest_Revision_Date=2016_04_26, Latest_Revision_Note="Attached footprint", MFG="NXP Semiconductors", MFG#=PSMN1R8-40YLC,115, Pin Count=5, Publisher=AUVic, Reviewed_By="Ashwin Sira", Reviewed_Date=2016_04_26, Source=AUVic_Schematic_Library_Transistors.SchLib
R1 R3: library part CMP-00060-1, "Res Thick Film 0603 33 Ohm 1% 1/10W +/-100ppm/ßC Molded SMD Paper T/R", Case Code (Imperial)=0603, Case Code (Metric)=1608, Max Operating Temperature=155°C, Max Power Dissipation=100mW, Min Operating Temperature=-55°C, Package Quantity=1, Resistance=33R, Temperature Coefficient=100ppm/°C, Tolerance=1%, Voltage Rating=75V, Voltage Rating (DC)=50V, Case/Package=0603, Composition="Thick Film", Depth=0.8mm, Features="Moisture Resistant", Height=0.45mm, Lead Free="Lead Free", Lead Pitch=0.3mm, Length=1.6mm, Military Standard=Not, Number of Pins=2, Number of Terminations=2, Packaging="Tape and Reel", Power Rating=100mW, REACH SVHC="No SVHC", Termination=SMD/SMT, Weight=7.1E-05oz, Width=0.8mm
R2: library part CMP-00061-1, "Res Thick Film 0603 120 Ohm 1% 0.1W(1/10W) ±100ppm/C Epoxy SMD T/R", Case Code (Imperial)=0603, Case Code (Metric)=1608, Max Operating Temperature=155°C, Max Power Dissipation=100mW, Min Operating Temperature=-55°C, Package Quantity=1, Resistance=120R, Temperature Coefficient=100ppm/°C, Tolerance=1%, Voltage Rating=50V, Case/Package=0603, Composition="Thick Film", Depth=0.8mm, Features="Moisture Resistant", Height=0.022inch, Lead Free="Lead Free", Length=1.6mm, Military Standard=Not, Number of Pins=2, Number of Terminations=2, Packaging="Tape and Reel", Power Rating=100mW, REACH SVHC="No SVHC", Termination=SMD/SMT, Voltage Rating (DC)=50V, Width=0.031inch
R4_P1 R4_P2 R4_P3: library part CMP-00121-1, "VISHAY         CRCW060332K4FKEA.             SMD Chip Resistor, Thick Film, 32.4 kohm, 75 V, 0603 [1608 Metric], 100 mW,  1%, CRCW Series", Case Code (Imperial)=0603, Case Code (Metric)=1608, Max Operating Temperature=155°C, Max Power Dissipation=100mW, Min Operating Temperature=-55°C, Package Quantity=10, Resistance=32.4kR, Resistor Type="Thick Film", Temperature Coefficient=100ppm/°C, Tolerance=1%, Voltage Rating=75V, Case/Package=0603, Contact Plating=Tin, Depth=0.85mm, Features="Automotive AEC-Q200", Height=0.45mm, Lead Free="Lead Free", Length=1.55mm, Military Standard=Not, Mount="Surface Mount", Number of Pins=2, Number of Terminations=2, Packaging="Tape and Reel", Power Rating=100mW, REACH SVHC=Unknown, Termination=SMD/SMT, Voltage Rating (DC)=75V, Weight=7.1E-05oz, Width=0.85mm
R5_P1 R5_P2 R5_P3 R10 R11 R13 R14 R15 R18 R24 R25: library part CMP-047-0013-1, Component Type=Standard, Created On=14-05-31, Design Item ID="10kR, 1%, 1/10W, 0603 SMD", Last Edited=14-05-31, Made By="Ashwin Sira", Owned By=AUVic, Pin Count=2, Source=AUVic_Schematic_Library_Resistors.SchLib
R6_P1 R6_P2 R6_P3: library part CMP-047-0006-1, Component Type=Standard, ComponentLink1Description=Digikey, ComponentLink1URL=https://www.digikey.ca/product-detail/en/te-connectivity-passive-product/RLP73V3AR020FTDF/A109677CT-ND/4032443, Created By="Robert Keen", Created On=2018-08-16, Design Item ID="0R02, 1%, 2W, 2512 SMD", Pin Count=2, Source=AUVic_Schematic_Library_Resistors.SchLib
R7: library part CMP-00067-2, "Res Thick Film 0603 330 Ohm 1% 0.1W(1/10W) +/-100ppm/ßC Pad SMD Automotive T/R", Case Code (Imperial)=0603, Case Code (Metric)=1608, Max Operating Temperature=155°C, Max Power Dissipation=100mW, Min Operating Temperature=-55°C, Package Quantity=10, Resistance=330R, Temperature Coefficient=100ppm/°C, Tolerance=1%, Voltage Rating=75V, Case/Package=0603, Composition="Thick Film", Contact Plating=Tin, Depth=0.85mm, Features="Automotive AEC-Q200", Height=0.45mm, Lead Free="Lead Free", Length=1.55mm, Military Standard=Not, Mount="Surface Mount", Number of Terminations=2, Packaging="Tape and Reel", Power Rating=100mW, Radiation Hardening=No, REACH SVHC=Unknown, Termination=SMD/SMT, Voltage Rating (DC)=75V, Weight=7.1E-05oz, Width=0.033inch
R8 R21 R22 R23: library part CMP-047-0024-1, Component Type=Standard, Created By="Andy Bates", Date Created=2017-05-10, Design Item ID="1kR, 1%, 1/10W , 0603, SMD", Pin Count=2, Publisher=AUVic, Source=AUVic_Schematic_Library_Resistors.SchLib
R9 R12 R28: library part CMP-00069-1, "RES SMD 110 OHM 1% 1/10W 0603", Case Code (Imperial)=0603, Case Code (Metric)=1608, Max Operating Temperature=155°C, Max Power Dissipation=100mW, Min Operating Temperature=-55°C, Package Quantity=1, Resistance=110R, Temperature Coefficient=100ppm/°C, Tolerance=1%, Voltage Rating=50V, Working Voltage=75V, Case/Package=0603, Composition="Thick Film", Depth=0.8mm, Features="Moisture Resistant", Height=0.022inch, Lead Free="Lead Free", Length=1.6mm, Military Standard=Not, Number of Terminations=2, Packaging="Tape and Reel", Power Rating=100mW, Termination=SMD/SMT, Voltage Rating (DC)=50V, Width=0.031inch
R16: library part CMP-00085-1, "RES SMD 82.5K OHM 1% 1/10W 0603", Case Code (Imperial)=0603, Case Code (Metric)=1608, Max Operating Temperature=155°C, Max Power Dissipation=100mW, Min Operating Temperature=-55°C, Package Quantity=1, Resistance=82.5kR, Temperature Coefficient=100ppm/°C, Tolerance=1%, Voltage Rating=75V, Voltage Rating (DC)=50V, Case/Package=0603, Composition="Thick Film", Contact Plating=Tin, Depth=0.8mm, Features="Automotive AEC-Q200", Height=0.022inch, Lead Free="Lead Free", Length=1.6mm, Military Standard=Not, Mount="Surface Mount", Number of Terminations=2, Packaging="Tape and Reel", Power Rating=100mW, Radiation Hardening=No, REACH SVHC="No SVHC", Termination=SMD/SMT, Width=0.031inch
R17: library part CMP-047-0021-1, Component Type=Standard, Created On=14-05-31, Design Item ID="16kR, 1%, 1/10W, 0603 SMD", Last Edited=14-05-31, Made By="Ashwin Sira", Owned By=AUVic, Pin Count=2, Source=AUVic_Schematic_Library_Resistors.SchLib
R19: library part CMP-00037-1, "Res General Purpose Thick Film 0603 10K Ohm 1% 1/10W ±100ppm/°C Molded SMD Paper T/R", Case Code (Imperial)=0603, Case Code (Metric)=1608, Max Operating Temperature=155°C, Min Operating Temperature=-55°C, Power Rating=100mW, Resistance=10kR, Temperature Coefficient=100ppm/°C, Tolerance=1%, Voltage Rating=75V, Voltage Rating (DC)=50V, Case/Package=0603, Composition="Thick Film", Depth=0.8mm, Height=0.45mm, Lead Free="Lead Free", Lead Pitch=0.3mm, Length=1.6mm, Military Standard=Not, Number of Pins=2, Packaging="Tape and Reel", REACH SVHC="No SVHC", Termination=SMD/SMT, Weight=7.1E-05oz, Width=0.8mm
R20: library part CMP-00090-2, "Res Thick Film 0603 27K Ohm 1% 0.1W(1/10W) ±100ppm/C Pad SMD Automotive T/R"
R26: library part CMP-00072-1, "VISHAY         CRCW06036K34FKEA.             SMD Chip Resistor, Thick Film, 6.34 kohm, 75 V, 0603 [1608 Metric], 100 mW,  1%, CRCW Series", Case Code (Imperial)=0603, Case Code (Metric)=1608, Max Operating Temperature=155°C, Max Power Dissipation=100mW, Min Operating Temperature=-55°C, Package Quantity=10, Resistance=6.34kR, Temperature Coefficient=100ppm/°C, Tolerance=1%, Voltage Rating=75V, Case/Package=0603, Composition="Thick Film", Contact Plating=Tin, Depth=0.85mm, Features="Automotive AEC-Q200", Height=0.45mm, Length=1.55mm, Military Standard=Not, Number of Pins=2, Number of Terminations=2, Packaging="Tape and Reel", Power Rating=100mW, Radiation Hardening=No, REACH SVHC=Unknown, Termination=SMD/SMT, Weight=7.1E-05oz, Width=0.033inch
R27: library part CMP-00071-1, "SMD Chip Resistor, 0603 [1608 Metric], 536 ohm, ERJ3EK Series, 75 V, Thick Film, 100 mW", Case Code (Imperial)=0603, Case Code (Metric)=1608, Max Operating Temperature=155°C, Max Power Dissipation=100mW, Min Operating Temperature=-55°C, Package Quantity=1, Resistance=536R, Temperature Coefficient=100ppm/°C, Tolerance=1%, Voltage Rating=75V, Voltage Rating (DC)=50V, Case/Package=0603, Composition="Thick Film", Contact Plating=Tin, Depth=0.8mm, Features="Automotive AEC-Q200", Height=0.022inch, Lead Free="Lead Free", Length=1.6mm, Military Standard=Not, Mount="Surface Mount", Number of Terminations=2, Packaging="Tape and Reel", Power Rating=100mW, REACH SVHC="No SVHC", Termination=SMD/SMT, Width=0.8mm
SW1: library part CMP-00077-1, "Black Switch Tactile N.O. SPST Round Button Gull Wing 0.05A 12VDC 100000Cycles 1.27N SMD T/R", Button Colour=Black, Contact Resistance=100mR, Current Rating=50mA, Max Operating Temperature=60°C, Max Voltage Rating (DC)=12V, Min Operating Temperature=-20°C, Operating Force=1.27N, Package Quantity=1000, Actuator Length=0.85mm, Actuator Material=Nylon,Polyamide, Actuator Type=Standard, Color=Black, Contact Material=Bronze,Brass,Silver, Contact Plating=Silver, Depth=9mm, Illumination Type=Non-Illuminated, Lead Free="Lead Free", Length=6mm, Max Current Rating=50mA, Mechanical Life=100000Cycles, Mount="Surface Mount", Orientation=Straight, Packaging="Tape and Reel", Switch Function=Off-Mom, Termination="Gull Wing", Throw Configuration=SPST, Voltage Rating (DC)=12V
TVS1 TVS2: library part CMP-058-0000-2, "TVS DIODE 36V 60V SOT23", Component Type=Standard, Created By="Miguel Manguerra", Date Created=2020-05-18, Design Item ID=PESD36VS2UT,215, Pin Count=3, Source=AUVic_Schematic_Library_Diodes.SchLib
U1: library part CMP-032-0000-2, "1/1 Transceiver Half CANbus 8-SO", Case/Package=SO, Max Operating Temperature=150°C, Max Supply Current=70mA, Max Supply Voltage=5.5V, Min Operating Temperature=-40°C, Min Supply Voltage=4.5V, Package Quantity=2500, Contact Plating=Gold, Data Rate=1Mbps, Interface=CAN, Lead Free="Lead Free", Mount="Surface Mount", Nominal Supply Current=70mA, Number of Pins=8, Number of Transceivers=1, Packaging="Tape and Reel", Propagation Delay=250ns, Radiation Hardening=No, Turn-On Delay Time=250ns
U2_P1 U2_P2 U2_P3: library part CMP-048-0001-2, Component Type=Standard, Created By="Jacob Lower", Created On=2016-03-16, Design Item ID="INA168, Current Sensor, High-Side, Analog", Pin Count=5, Publisher=AUVic, Source=AUVic_Schematic_Library_Sensors.SchLib
U3_P1 U3_P2 U3_P3: library part CMP-028-0000-2, "High-Side or Low-Side Gate Driver IC Non-Inverting 8-SOIC", Case/Package=SOIC, Max Operating Temperature=85°C, Max Output Current=10mA, Max Supply Voltage=30V, Min Operating Temperature=-40°C, Min Supply Voltage=2.75V, Package Quantity=2500, Channel Type=Single, Height=1.48mm, Lead Free="Lead Free", Length=4.93mm, Mount="Surface Mount", Number of Drivers=1, Number of Outputs=1, Number of Pins=8, Packaging="Tape and Reel", Turn-Off Delay Time=30us, Turn-On Delay Time=8ms, Width=3.94mm
U4: library part CMP-00006-2, "STMICROELECTRONICS - STM32F413RGT6 - MCU, ARM CORTEX-M4, 100MHZ, LQFP-64", Case/Package=LQFP, Frequency=100MHz, Max Operating Temperature=85°C, Min Operating Temperature=-40°C, Core Architecture=ARM, Interface=I2C,SPI,USB,IrDA,MMC,SDIO,UART,USART, Memory Size=1MB, Memory Type=FLASH, Number of I/Os=50, Oscillator Type=Internal, Packaging=Tray, Peripherals="Brown-out Detect/Reset,POR,PWM,WDT,DMA,LCD"
U5: library part CMP-00003-1, "IC REG LINEAR 3.3V 250MA SOT23-3", Case/Package=SOT-23-3, Dropout Voltage=400mV, Max Input Voltage=6.6V, Max Operating Temperature=85°C, Max Output Current=250mA, Min Input Voltage=2.5V, Min Operating Temperature=-40°C, Output Voltage=3.3V, Package Quantity=3000, Quiescent Current=1uA, Supplier Part Number 1=AP2138N-3.3TRG1, Accuracy=2%, Created By="Poorna Chander Kalidas", Date Created="June 26, 2020", Height=1.3mm, Lead Free="Lead Free", Length=3.02mm, Mount="Surface Mount", Number of Outputs=1, Number of Pins=3, Number of Regulators=1, Output Current=250mA, Output Type=Fixed, Packaging="Tape and Reel", Polarity=Positive, Supplier 1=Digi-Key, Weight=0.000282oz, Width=1.7mm

## Via types
v1: diameter 0.6, hole 0.3, Top Layer to Bottom Layer, tented both sides, 9 vias

## Nets (pads, with @x,y where several pads share a name; then routed paths per layer and width w, separated by ;. In a path a pad name is that pad's centre, name@x,y a point inside that pad or via, vN(x,y) a via of type N, cw(c..) or ccw(c..) an arc to the next point about the centre after c; other vN are vias at no path point)
3V3: C3.1 C10.1 C11.1 C12.1 C13.1 C14.1 C15.1 C16.1 C20.2 CN3.2 FB1.1 JP3.1 R8.1 R15.1 R18.1 R24.1 R28.1 U1.5 U4.19 U4.32 U4.48 U4.64 U5.2
5V: C1.1 C2.1 C4_P1.2 C4_P2.2 C4_P3.2 C18.2 C19.2 CN6.4 D5.K F1.2 R17.2 R27.1 U1.3 U2_P1.5 U2_P2.5 U2_P3.5 U5.3 | length 5.4
  Top Layer w0.254: U2_P2.5 C4_P2.2 ; U2_P1.5 C4_P1.2 ; U2_P3.5 C4_P3.2
5V_ADC: R17.1 R20.2 U4.17
5V_DEBUG: CN3.1 D5.A
blue: R9.1 U4.59
BOOT0: JP3.2 R25.1 U4.60
CAN_N: CN1.2 JP2.2 R2.2 TVS2.2 U1.6
CAN_P: CN1.1 JP2.1 R2.1 TVS1.1 U1.7
"Current Shunt In_P1": D1_P1.2 Q1_P1.1 Q1_P1.2 Q1_P1.3 R6_P1.2 U2_P1.3 U3_P1.3 | length 4.6
  Top Layer w0.254: R6_P1.2 100.8,115.55 101.5,116.25 U2_P1.3
"Current Shunt In_P2": D1_P2.2 Q1_P2.1 Q1_P2.2 Q1_P2.3 R6_P2.2 U2_P2.3 U3_P2.3 | length 4.6
  Top Layer w0.254: R6_P2.2 80.55,91.55 81.25,92.25 U2_P2.3
"Current Shunt In_P3": D1_P3.2 Q1_P3.1 Q1_P3.2 Q1_P3.3 R6_P3.2 U2_P3.3 U3_P3.3 | length 4.6
  Top Layer w0.254: R6_P3.2 125.35,91 126.05,91.7 U2_P3.3
"Current Shunt Out_P1": CN2_P1.3 CN2_P1.4 R6_P1.1 U2_P1.4 | length 4.9
  Top Layer w0.254: U2_P1.4 104.2,116.3 104.95,115.55 R6_P1.1
"Current Shunt Out_P2": CN2_P2.3 CN2_P2.4 R6_P2.1 U2_P2.4 | length 4.9
  Top Layer w0.254: U2_P2.4 83.95,92.3 84.7,91.55 R6_P2.1
"Current Shunt Out_P3": CN2_P3.3 CN2_P3.4 R6_P3.1 U2_P3.4 | length 4.9
  Top Layer w0.254: U2_P3.4 128.75,91.75 129.5,91 R6_P3.1
GND: C1.2 C2.2 C3.2 C4_P1.1 C4_P2.1 C4_P3.1 C5_P1.2 C5_P2.2 C5_P3.2 C6_P1.2 C6_P2.2 C6_P3.2 C7.2 C8.2 C9.2 C10.2 C11.2 C12.2 C13.2 C14.2 C15.2 C16.2 C17.2 C18.1 C19.1 C20.1 CN3.5 CN3.10 CN4.1 D2.1 D3.1 D4.1 D6.1 D7.1 D8.1 NT1.2 R4_P1.1 R4_P2.1 R4_P3.1 R5_P1.2 R5_P2.2 R5_P3.2 R10.2 R11.2 R13.2 R14.1 R19.2 R20.1 R25.2 SW1.3 SW1.4 TVS1.2 TVS2.1 U1.2 U2_P1.2 U2_P2.2 U2_P3.2 U3_P1.4 U3_P2.4 U3_P3.4 U4.12 U4.18 U4.31 U4.47 U4.63 U5.1
green: R12.1 U4.26
NetCN4_3: CN4.3 F1.1
NetCN5_1: CN5.1 R8.2
NetD2_2: D2.2 R7.2
NetD3_2: D3.2 R9.2
NetD4_2: D4.2 R12.2
NetD6_2: D6.2 R26.2
NetD7_2: D7.2 R27.2
NetD8_2: D8.2 R28.2
NetJP1_1: JP1.1 R1.1 U4.34
NetJP1_2: JP1.2 R3.1 U4.33
NetQ1_P1_4: Q1_P1.4 U3_P1.5 | length 16.6
  Top Layer w0.254: U3_P1.5 96.5,112.22 v1(96.5,110.5) ; v1(96.5,124) 96.5,122.805 Q1_P1.4
  Bottom Layer w0.254: v1(96.5,110.5) v1(96.5,124)
NetQ1_P2_4: Q1_P2.4 U3_P2.5 | length 16.6
  Top Layer w0.254: U3_P2.5 76.25,88.22 v1(76.25,86.5) ; v1(76.25,100) 76.25,98.805 Q1_P2.4
  Bottom Layer w0.254: v1(76.25,86.5) v1(76.25,100)
NetQ1_P3_4: Q1_P3.4 U3_P3.5 | length 16.6
  Top Layer w0.254: U3_P3.5 121.05,87.67 v1(121.05,85.95) ; v1(121.05,99.45) 121.05,98.255 Q1_P3.4
  Bottom Layer w0.254: v1(121.05,85.95) v1(121.05,99.45)
NetR1_2: R1.2 U1.1
NetR3_2: R3.2 U1.4
NetR21_1: R21.1 U4.51
NetR22_1: R22.1 U4.52
NetR23_1: R23.1 U4.53
NetU1_8: U1.8 U4.29
NRST: C17.1 CN3.8 R24.2 SW1.1 SW1.2 U4.7
OSC_IN: U4.5
OSC_OUT: U4.6
PGND: CN2_P1.1 CN2_P1.2 CN2_P2.1 CN2_P2.2 CN2_P3.1 CN2_P3.2 CN6.1 CN6.2 CN6.3 D1_P1.1 D1_P2.1 D1_P3.1 NT1.1
Phase_Current1: R4_P1.2 U2_P1.1 U4.8 | length 6.8
  Top Layer w0.254: U2_P1.1 v1@102.75,121
  Bottom Layer w0.254: R4_P1.2 101.5,124.75 102.822,123.428 v1(102.822,121.032)
Phase_Current2: R4_P2.2 U2_P2.1 U4.9 | length 6.8
  Top Layer w0.254: U2_P2.1 v1@82.5,97
  Bottom Layer w0.254: R4_P2.2 81.25,100.75 82.572,99.428 v1(82.572,97.032)
Phase_Current3: R4_P3.2 U2_P3.1 U4.10 | length 6.8
  Top Layer w0.254: U2_P3.1 v1@127.3,96.45
  Bottom Layer w0.254: R4_P3.2 126.05,100.2 127.372,98.878 v1(127.372,96.482)
Phase_Input1: R5_P1.1 U3_P1.2 U4.37 | length 7.5
  Top Layer w0.254: U3_P1.2 93.95,114.8 94.6,114.15 R5_P1.1
Phase_Input2: R5_P2.1 U3_P2.2 U4.38 | length 7.5
  Top Layer w0.254: U3_P2.2 73.7,90.8 74.35,90.15 R5_P2.1
Phase_Input3: R5_P3.1 U3_P3.2 U4.39 | length 7.5
  Top Layer w0.254: U3_P3.2 118.5,90.25 119.15,89.6 R5_P3.1
red: R7.1 U4.35
"Sensor Input 1": CN5.2 R10.1 R21.2
"Sensor Input 2": CN5.3 R11.1 R22.2
"Sensor Input 3": CN5.4 R13.1 R23.2
"Servo Motor": CN4.2 U4.21
SWCLK: CN3.6 R14.2 U4.49
SWDIO: CN3.7 R15.2 U4.46
SWO: CN3.9 R18.2 U4.55
UART_RX: CN3.4 U4.15
UART_TX: CN3.3 U4.14
VBATT: C5_P1.1 C5_P2.1 C5_P3.1 C6_P1.1 C6_P2.1 C6_P3.1 CN6.5 CN6.6 Q1_P1.5 Q1_P2.5 Q1_P3.5 R16.1 R26.1 U3_P1.1 U3_P2.1 U3_P3.1
VBATT_ADC: R16.2 R19.1 U4.16
VCAP1: C9.1 U4.30
VREF+: C7.1 C8.1 FB1.2 U4.13
pads on no net: CN2_P1.None CN2_P2.None CN2_P3.None CN6.None1 CN6.None2 MH1.1 MH2.1 MH3.1 MH4.1 TVS1.3 TVS2.3 U3_P1.6 U3_P1.7 U3_P1.8 U3_P2.6 U3_P2.7 U3_P2.8 U3_P3.6 U3_P3.7 U3_P3.8 U4.1 U4.2 U4.3 U4.4 U4.11 U4.20 U4.22 U4.23 U4.24 U4.25 U4.27 U4.28 U4.36 U4.40 U4.41 U4.42 U4.43 U4.44 U4.45 U4.50 U4.54 U4.56 U4.57 U4.58 U4.61 U4.62

## Polygon pours and split planes (outlines as drawn)
"Current Shunt In_P1" on Top Layer "CURRENT_SHUNT_IN_P1_L01_P002" (solid, remove dead copper, pour order 2): 131.8,95.5 134.05,97.75 137.3,97.75 137.3,102.7 122.3,102.7 122.3,97.7 119.8,97.7 119.8,92.95 122.55,92.95 122.55,88.25 127.3,88.25 127.3,95.5
"Current Shunt Out_P1" on Top Layer "CURRENT_SHUNT_OUT_P1_L01_P000" (solid, remove dead copper, pour order 0): 127.3,95.5 131.8,95.5 134.05,97.75 137.3,97.75 137.3,88.25 127.3,88.25
"Current Shunt In_P1" on Top Layer "CURRENT_SHUNT_IN_P1_L01_P002" (solid, remove dead copper, pour order 2): 87,96.05 89.25,98.3 92.5,98.3 92.5,103.25 77.5,103.25 77.5,98.25 75,98.25 75,93.5 77.75,93.5 77.75,88.8 82.5,88.8 82.5,96.05
"Current Shunt Out_P1" on Top Layer "CURRENT_SHUNT_OUT_P1_L01_P000" (solid, remove dead copper, pour order 0): 82.5,96.05 87,96.05 89.25,98.3 92.5,98.3 92.5,88.8 82.5,88.8
"Current Shunt Out_P1" on Top Layer "CURRENT_SHUNT_OUT_P1_L01_P000" (solid, remove dead copper, pour order 0): 102.75,120.05 107.25,120.05 109.5,122.3 112.75,122.3 112.75,112.8 102.75,112.8